# Altium PCB pcb.PcbDoc (part 1 of 2)
Units mil, origin at the board's own origin, x right, y up, seen from the top; angles counter-clockwise.
Board outline 6000 x 4000 mil, 4 copper layers (Top Layer, Ground, Power, Bottom Layer), stack 64.6 mil thick; 209 components, 184 nets, 1089 pads, 303 vias.
Unrouted connection lines stored in the file: 45.
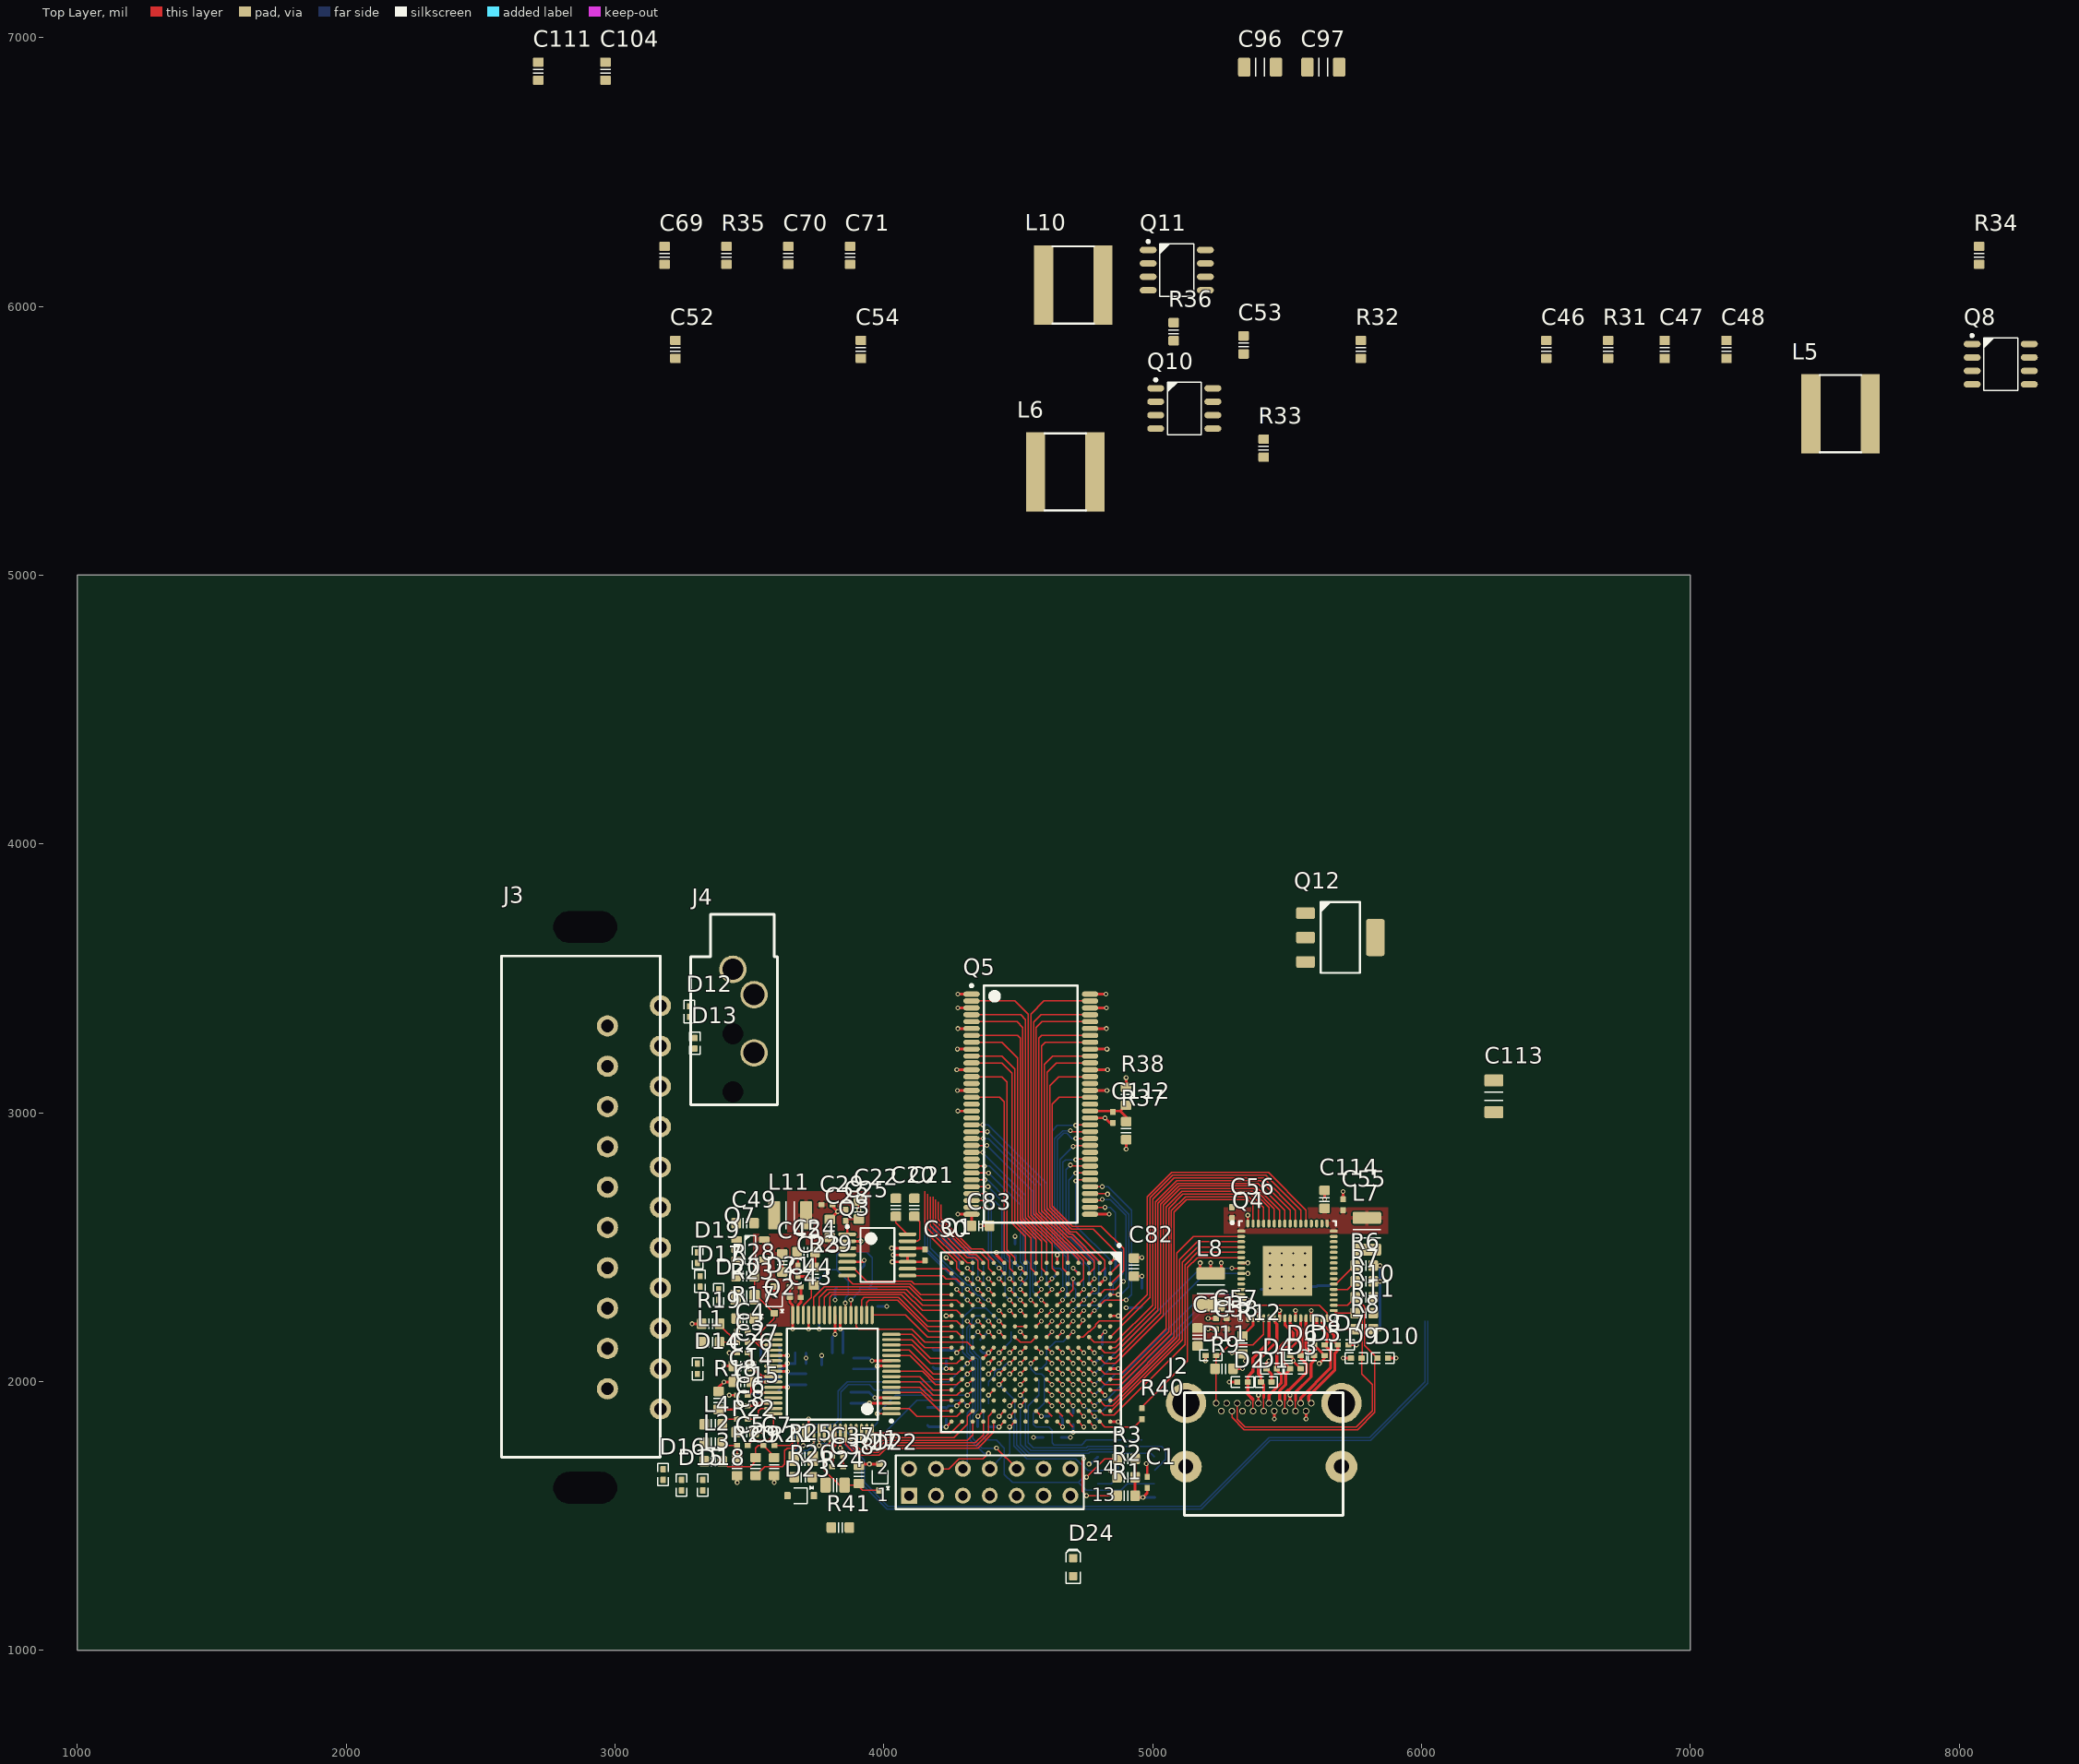
[diagram p0: Top Layer view]
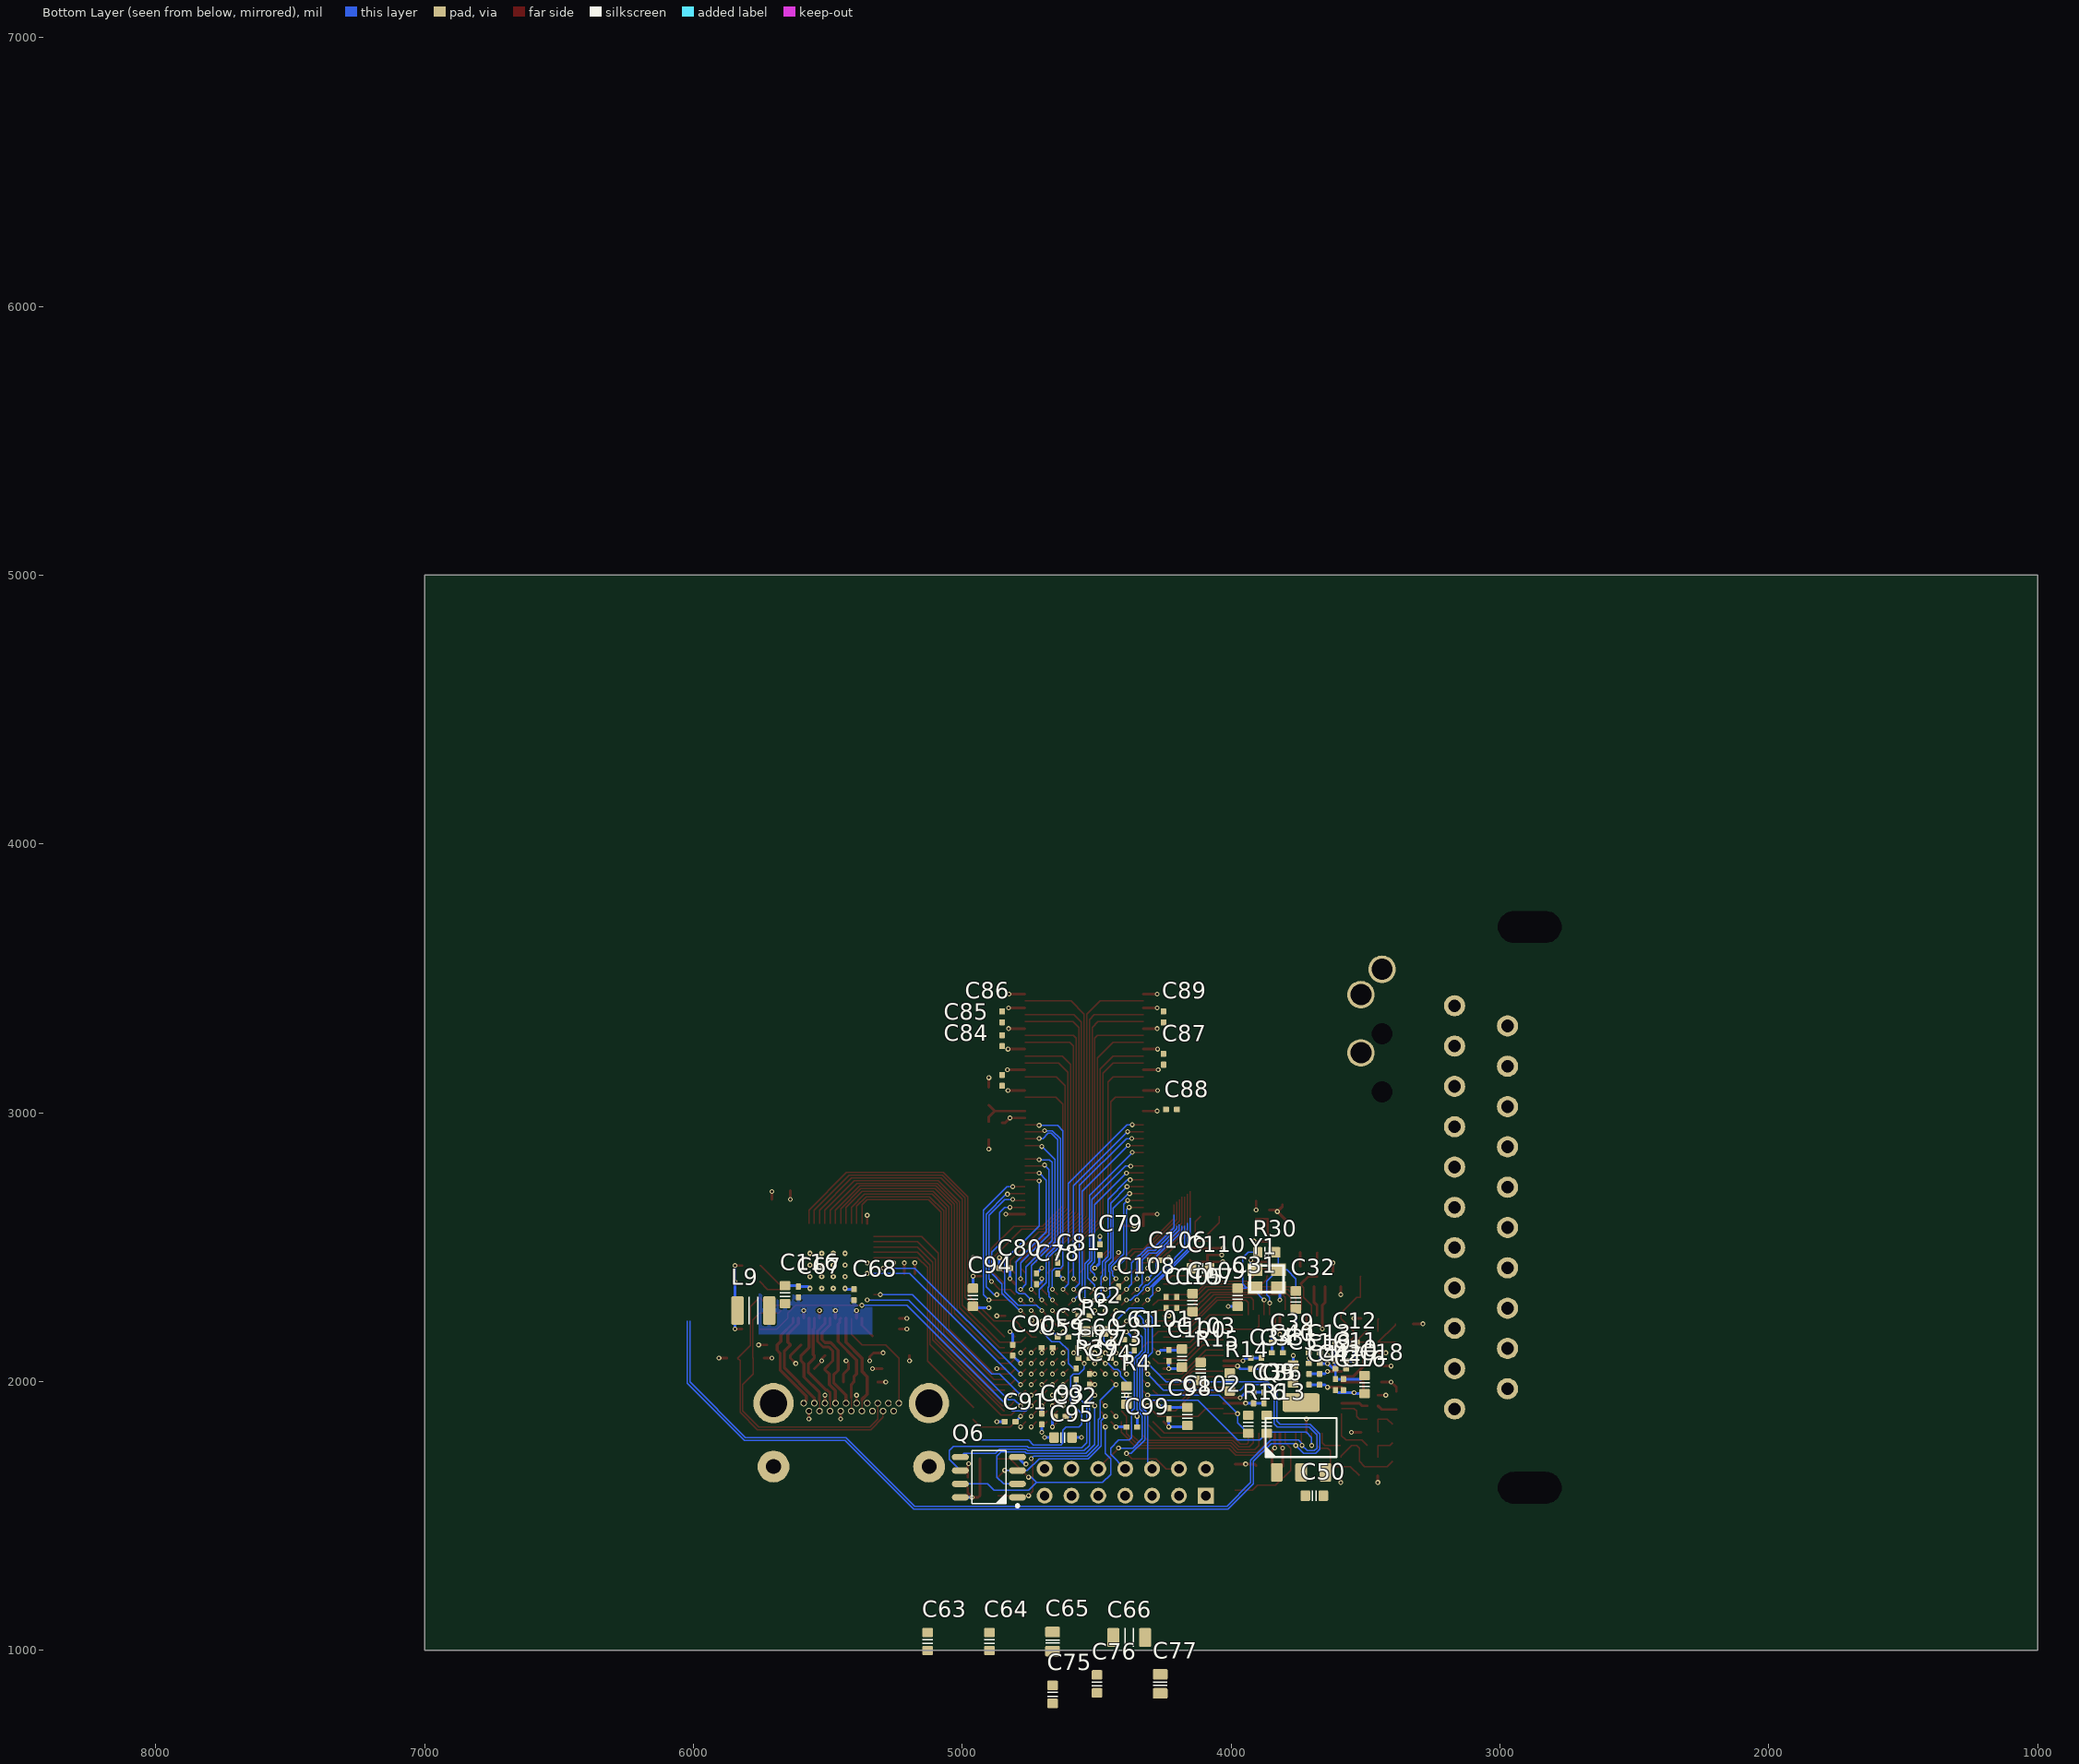
[diagram p1: Bottom Layer view, seen from below]

## Layer stack, top to bottom
Top Layer: signal copper 1.4
Dielectric: prepreg 6.7, FR-4, Dk 3.66
Ground: signal copper 0.7
Dielectric: core 47, FR-4, Dk 3.66
Power: signal copper 0.7
Dielectric: prepreg 6.7, FR-4, Dk 3.66
Bottom Layer: signal copper 1.4

## Board outline
1000,1000 7000,1000 7000,5000 1000,5000

## Design rules (kind name [scope] priority, off if disabled: settings)
Clearance [All] p1: gap=5
DiffPairsRouting [All] p1: maxlimit=5 minlimit=5 mostfreqgap=5 maxuncoupledlength=500
HoleSize [All] p1: absolutevalues=TRUE maxlimit=100 minlimit=10 maxpercent=80.000 minpercent=20.000
PolygonConnect [All] p1: connectstyle=Relief reliefconductorwidth=15 reliefentries=4 polygonreliefangle="90 Angle" airgapwidth=5
RoutingVias [All] p1: holewidth=10 width=18 viastyle="Through Hole" minholewidth=10 minwidth=18 maxholewidth=10 maxwidth=18
SolderMaskExpansion ViaMask [IsVia] p1: expansion=-9999
SolderMaskExpansion [All] p2: expansion=4
Width [All] p1: maxlimit=20 minlimit=5 preferedwidth=5
26 further rules are at their usual default settings.

## Classes and differential pairs
component class power: C33 C34 C35 C36 C37 C38 C39 C40 C41 C42 C43 C44 C45 C46 C47 C48 C49 C50 C51 C52 C53 C54 C55 C56 C57 C58 C59 C60 C61 C62 C63 C64 C65 C66 C67 C68 C69 C70 C71 C72 C73 C74 C75 C76 C77 C78 C79 C80 C81 C82 C83 C84 C85 C86 C87 C88 C89 C90 C91 C92 C93 C94 C95 C96 C97 C98 C99 C100 C101 C102 C103 C104 C105 C106 C107 C108 C109 C110 C111 C113 C114 C115 C116 L5 L6 L7 L8 L9 L10 Q1 Q7 Q8 Q9 Q10 Q11 Q12 R31 R32 R33 R34 R35 R36
component class mem: C112 Q5 R37 R38
component class input: C3 C4 C5 C6 C7 C8 C9 C10 C11 C12 C13 C14 C15 C16 C17 C18 C19 C20 C21 C22 C23 C24 C25 C26 C27 C28 C29 C30 C31 C32 D12 D13 D14 D15 D16 D17 D18 D19 D20 D21 D22 D23 J3 J4 L1 L2 L3 L4 L11 Q2 Q3 R13 R14 R15 R16 R17 R18 R19 R20 R21 R22 R23 R24 R25 R26 R27 R28 R29 R30 Y1
component class hdmi: D1 D2 D3 D4 D5 D6 D7 D8 D9 D10 D11 J2 Q4 R6 R7 R8 R9 R10 R11 R12 R40
component class fpga: C1 C2 D24 J1 Q6 R1 R2 R3 R4 R5 R39 R41
differential pair HDC: +HDC_P -HDC_N
differential pair HD2: +HD2_P -HD2_N
differential pair HD1: +HD1_P -HD1_N
differential pair HD0: +HD0_P -HD0_N
differential pair CK: +CK_P -CK_N

## Components (designator, comment, footprint, x,y, rotation, side; value= is the part's Value field where it differs from the comment)
C1 "Cap" CAPC1005X06L 4980.31,1624.02 r270 top
C2 "Cap" CAPC1005X06L 4625.98,2165.35 r180 bottom
C3 "Cap" CAPC1005X06L 3474.41,2145.67 r0 top
C4 "Cap" CAPC1005X06L 3474.41,2185.04 r0 top
C5 "Cap" CAPC1005X06L 3474.41,1761.81 r0 top
C6 "Cap" CAPC1005X06L 3474.41,1909.45 r0 top
C7 "Cap" CAPC1005X06L 3572.83,1761.81 r0 top
C8 "Cap" CAPC1005X06L 3474.41,1860.24 r0 top
C9 "Cap" CAPC1608X90N 3523.62,1683.07 r270 top
C10 "Cap" CAPC1005X06L 3592.52,2047.24 r180 bottom
C11 "Cap" CAPC1005X06L 3592.52,2076.77 r180 bottom
C12 "Cap" CAPC1608X90N 3572.83,2135.83 r180 bottom
C13 "Cap" CAPC1005X06L 3690.94,2106.3 r0 bottom
C14 "Cap" CAPC1608X90N 3474.41,1998.03 r0 top
C15 "Cap" CAPC1005X06L 3474.41,1948.82 r0 top
C16 "Cap" CAPC1005X06L 3582.68,1988.19 r90 bottom
C17 "Cap" CAPC1005X06L 3612.2,1988.19 r90 bottom
C18 "Cap" CAPC1608X90N 3503.94,1988.19 r90 bottom
C19 "Cap" CAPC1005X06L 3690.94,2066.93 r180 bottom
C20 "Cap" CAPC1608X90N 4045.28,2647.64 r270 top
C21 "Cap" CAPC1608X90N 4114.17,2647.64 r270 top
C22 "Cap" CAPC1608X90N 3907.48,2637.8 r90 top
C23 "Cap" CAPC1005X06L 3681.1,2411.42 r270 top
C24 "Cap" CAPC1608X90N 3710.63,2480.32 r0 top
C25 "Cap" CAPC1005X06L 3858.27,2618.11 r90 top
C26 "Cap" CAPC1608X90N 3474.41,2057.09 r0 top
C27 "Cap" CAPC1005X06L 3474.41,2106.3 r0 top
C28 "Cap" CAPC1608X90N 3799.21,2568.9 r90 top
C29 "Cap" CAPC1005X06L 3789.37,2657.48 r0 top
C30 "Cap" CAPC1005X06L 4153.54,2470.47 r90 top
C31 "Cap" CAPC1608X90N 3976.38,2312.99 r90 bottom
C32 "Cap" CAPC1608X90N 3759.84,2303.15 r90 bottom
C33 "Cap" CAPC1005X06L 3887.8,2066.93 r90 bottom
C34 "Cap" CAPC1005X06L 3927.17,2066.93 r90 bottom
C35 "Cap" CAPC1005X06L 3917.32,1938.98 r90 bottom
C36 "Cap" CAPC1005X06L 3877.95,1938.98 r90 bottom
C37 "Cap" CAPC1005X06L 3828.74,1722.44 r0 top
C38 "Cap" CAPC1005X06L 3828.74,1683.07 r0 top
C39 "Cap" CAPC1005X06L 3828.74,2145.67 r0 bottom
C40 "Cap" CAPC1005X06L 3828.74,2106.3 r0 bottom
C41 "Cap" CAPC1005X06L 3710.63,2007.87 r90 bottom
C42 "Cap" CAPC1005X06L 3671.26,2007.87 r90 bottom
C43 "Cap" CAPC1005X06L 3671.26,2312.99 r0 top
C44 "Cap" CAPC1005X06L 3671.26,2352.36 r0 top
C45 "Cap" CAPC1608X90N 3622.05,2440.94 r270 top
C46 "Cap" CAPC1608X90N 6465,5839.72 r90 top
C47 "Cap" CAPC1608X90N 6905,5839.72 r90 top
C48 "Cap" CAPC1608X90N 7135,5839.72 r90 top
C49 "Cap" CAPC1608X90N 3484.25,2588.58 r0 top
C50 "Cap" CAPC1608X90N 3690.94,1574.8 r0 bottom
C51 "Cap" CAPC1608X90N 3769.68,2027.56 r90 bottom
C52 "Cap" CAPC1608X90N 3225,5839.72 r90 top
C53 "Cap" CAPC1608X90N 5338.58,5856.3 r90 top
C54 "Cap" CAPC1608X90N 3915,5839.72 r90 top
C55 "Cap" CAPC1005X06L 5708.66,2657.48 r90 top
C56 "Cap" CAPC1005X06L 5295.28,2627.95 r90 top
C57 "Cap" CAPC1005X06L 5255.91,2234.25 r180 top
C58 "Cap" CAPC1005X06L 5255.91,2194.88 r180 top
C59 "Cap" CAPC1005X06L 4685.04,2125.98 r180 bottom
C60 "Cap" CAPC1005X06L 4547.24,2125.98 r0 bottom
C61 "Cap" CAPC1005X06L 4419.29,2155.51 r0 bottom
C62 "Cap" CAPC1005X06L 4547.24,2244.09 r180 bottom
C63 "Cap" CAPC1608X90N 5129.65,1032.24 r90 bottom
C64 "Cap" CAPC1608X90N 4899.65,1032.24 r90 bottom
C65 "Cap" CAPC2012X135N 4664.65,1032.24 r90 bottom
C66 "Cap" CAPC3216X100N 4379.65,1047.24 r180 bottom
C67 "Cap" CAPC1005X06L 5610.24,2332.68 r270 bottom
C68 "Cap" CAPC1005X06L 5403.54,2322.83 r270 bottom
C69 "Cap" CAPC1608X90N 3185,6189.72 r90 top
C70 "Cap" CAPC1608X90N 3645,6189.72 r90 top
C71 "Cap" CAPC1608X90N 3875,6189.72 r90 top
C72 "Cap" CAPC1005X06L 4547.24,2086.61 r180 bottom
C73 "Cap" CAPC1005X06L 4468.5,2086.61 r180 bottom
C74 "Cap" CAPC1005X06L 4527.56,2007.87 r90 bottom
C75 "Cap" CAPC1608X90N 4664.53,835.75 r90 bottom
C76 "Cap" CAPC1608X90N 4499.41,874.76 r90 bottom
C77 "Cap" CAPC2012X135N 4264.41,874.76 r90 bottom
C78 "Cap" CAPC1005X06L 4724.41,2381.89 r270 bottom
C79 "Cap" CAPC1005X06L 4488.19,2490.16 r270 bottom
C80 "Cap" CAPC1005X06L 4842.52,2421.26 r180 bottom
C81 "Cap" CAPC1005X06L 4645.67,2421.26 r90 bottom
C82 "Cap" CAPC1608X90N 4931.1,2425.2 r270 top
C83 "Cap" CAPC1608X90N 4360.24,2578.74 r0 top
C84 "Cap" CAPC1005X06L 4852.36,3120.08 r90 bottom
C85 "Cap" CAPC1005X06L 4852.36,3267.72 r90 bottom
C86 "Cap" CAPC1005X06L 4852.36,3356.3 r270 bottom
C87 "Cap" CAPC1005X06L 4251.97,3198.82 r90 bottom
C88 "Cap" CAPC1005X06L 4222.44,3011.81 r0 bottom
C89 "Cap" CAPC1005X06L 4251.97,3356.3 r90 bottom
C90 "Cap" CAPC1005X06L 4812.99,2116.14 r270 bottom
C91 "Cap" CAPC1005X06L 4822.83,1850.39 r0 bottom
C92 "Cap" CAPC1005X06L 4635.83,1870.08 r180 bottom
C93 "Cap" CAPC1005X06L 4704.72,1860.24 r90 bottom
C94 "Cap" CAPC1608X90N 4960.63,2312.99 r90 bottom
C95 "Cap" CAPC1608X90N 4625.98,1791.34 r0 bottom
C96 "Cap" CAPC3216X100N 5400,6889.72 r0 top
C97 "Cap" CAPC3216X100N 5635,6889.72 r0 top
C98 "Cap" CAPC1005X06L 4232.28,1879.92 r90 bottom
C99 "Cap" CAPC1005X06L 4370.08,1830.71 r0 bottom
C100 "Cap" CAPC1005X06L 4232.28,2096.46 r270 bottom
C101 "Cap" CAPC1005X06L 4360.24,2135.83 r270 bottom
C102 "Cap" CAPC1608X90N 4163.39,1870.08 r270 bottom
C103 "Cap" CAPC1608X90N 4183.07,2086.61 r90 bottom
C104 "Cap" CAPC1608X90N 2965,6874.72 r90 top
C105 "Cap" CAPC1005X06L 4242.13,2293.31 r90 bottom
C106 "Cap" CAPC1005X06L 4281.5,2450.79 r180 bottom
C107 "Cap" CAPC1005X06L 4202.76,2293.31 r90 bottom
C108 "Cap" CAPC1005X06L 4419.29,2332.68 r90 bottom
C109 "Cap" CAPC1608X90N 4143.7,2293.31 r270 bottom
C110 "Cap" CAPC1608X90N 4114.17,2421.26 r0 bottom
C111 "Cap" CAPC1608X90N 2715,6874.72 r90 top
C112 "Cap" CAPC1005X06L 4852.36,2982.28 r270 top
C113 "Cap" CAPC3216X100N 6269.69,3061.02 r90 top
C114 "Cap" CAPC1608X90N 5639.76,2677.17 r270 top
C115 "Cap" CAPC1608X90N 5167.32,2165.35 r90 top
C116 "Cap" CAPC1608X90N 5659.45,2322.83 r90 bottom
D1 "EZAEG2A" CAPC1005X55N 5423.23,1998.03 r180 top
D2 "EZAEG2A" CAPC1005X55N 5334.65,1998.03 r0 top
D3 "EZAEG2A" CAPC1005X55N 5531.5,2047.24 r180 top
D4 "EZAEG2A" CAPC1005X55N 5442.91,2047.24 r0 top
D5 "EZAEG2A" CAPC1005X55N 5620.08,2096.46 r180 top
D6 "EZAEG2A" CAPC1005X55N 5531.5,2096.46 r0 top
D7 "EZAEG2A" CAPC1005X55N 5708.66,2135.83 r180 top
D8 "EZAEG2A" CAPC1005X55N 5620.08,2135.83 r0 top
D9 "EZAEG2A" CAPC1005X55N 5757.87,2086.61 r0 top
D10 "EZAEG2A" CAPC1005X55N 5856.3,2086.61 r180 top
D11 "EZAEG2A" CAPC1005X55N 5216.54,2096.46 r0 top
D12 "EZAEG2A" CAPC1005X55N 3277.56,3375.98 r90 top
D13 "EZAEG2A" CAPC1005X55N 3297.24,3257.87 r270 top
D14 "EZAEG2A" CAPC1005X55N 3307.09,2047.24 r90 top
D15 "EZAEG2A" CAPC1005X55N 3248.03,1614.17 r90 top
D16 "EZAEG2A" CAPC1005X55N 3179.13,1653.54 r90 top
D17 "EZAEG2A" CAPC1005X55N 3316.93,2372.05 r90 top
D18 "EZAEG2A" CAPC1005X55N 3326.77,1614.17 r90 top
D19 "EZAEG2A" CAPC1005X55N 3307.09,2460.63 r90 top
D20 "EZAEG2A" CAPC1005X55N 3385.83,2322.83 r90 top
D21 "3V3" SOD323 3592.52,2303.15 r90 top
D22 "3V3" SOD323 3986.22,1643.7 r90 top
D23 "3V3" SOD323 3690.94,1574.8 r180 top
D24 "LED2" LED-0603 4704.71,1309.05 r90 top
J1 "Header 7X2" HDR2X7 4094.49,1574.8 r0 top
J2 "HDMI" 2000-1-1-20-00-BK 5413.39,1919.29 r90 top
J3 "SCART" SCART 3169.29,2647.64 r90 top
J4 "AUDIO" SJ1-3533NG 3474.41,3533.46 r270 top
L1 "" CAPC1608X90N 3356.3,2145.67 r0 top
L2 "" CAPC1608X90N 3366.14,1771.65 r0 top
L3 "" CAPC1608X90N 3366.14,1702.76 r0 top
L4 "" CAPC1608X90N 3366.14,1840.55 r0 top
L5 "NRS8030T2R2NJGJ" NRS8030T2R2NJGJ 7559.06,5600.39 r180 top
L6 "NRS8030T2R2NJGJ" NRS8030T2R2NJGJ 4675.2,5383.86 r0 top
L7 "LBC3225T100KR" CAPC3225X220N 5797.24,2549.21 r270 top
L8 "LBC3225T100KR" CAPC3225X220N 5216.54,2342.52 r90 top
L9 "LBC3225T100KR" CAPC3225X220N 5777.56,2263.78 r0 bottom
L10 "NRS8030T2R2NJGJ" NRS8030T2R2NJGJ 4705,6079.72 r0 top
L11 "LBC3225T100KR" CAPC3225X220N 3651.57,2618.11 r0 top
Q1 "XC7A35T" BGA256C100P16X16_1700X1700X155 4547.24,2145.67 r270 top locked
Q2 "ADV7181C" TSQFP50P1200X1200X145-64N 3809.06,2027.56 r180 top locked
Q3 "PCM1808" TSOP65P640X120-14N 3976.38,2470.47 r0 top
Q4 "AD9889B" QFN50P900X875X100_HS-65N 5501.97,2411.42 r0 top
Q5 "AS4C8M16D1" TSOP65P1180X120-66N 4547.24,3031.5 r0 top locked
Q6 "S25FL032P" SOIC127P600X175-8AN 4901.57,1643.7 r0 bottom
Q7 "LDO235" SOT23-5 3503.94,2490.16 r0 top
Q8 "PAM2310" SOIC127P600X175-8AN 8155,5784.72 r0 top
Q9 "AP1117-3.3V" SOT223 3740.16,1791.34 r90 bottom
Q10 "PAM2310" SOIC127P600X175-8AN 5118.11,5620.08 r0 top
Q11 "PAM2310" SOIC127P600X175-8AN 5090,6134.72 r0 top
Q12 "AP1117-2.5V" SOT223 5698.82,3651.57 r0 top
R1 "Res3" CAPC1608X90N 4901.57,1574.8 r0 top
R2 "Res3" CAPC1608X90N 4901.57,1643.7 r0 top
R3 "Res3" CAPC1608X90N 4901.57,1712.6 r0 top
R4 "Res3" CAPC1608X90N 4389.76,1948.82 r270 bottom
R5 "Res3" CAPC1608X90N 4507.87,2185.04 r0 bottom
R6 "Res3" CAPC1608X90N 5787.4,2431.1 r0 top
R7 "Res3" CAPC1608X90N 5787.4,2372.05 r0 top
R8 "Res3" CAPC1608X90N 5787.4,2194.88 r0 top
R9 "Res3" CAPC1608X90N 5265.75,2047.24 r180 top
R10 "Res3" CAPC1608X90N 5787.4,2312.99 r180 top
R11 "Res3" CAPC1608X90N 5787.4,2253.94 r180 top
R12 "Res3" CAPC1608X90N 5334.65,2135.83 r90 top
R13 "Res3" CAPC1608X90N 3868.11,1840.55 r90 bottom
R14 "Res3" CAPC1608X90N 4005.91,1998.19 r90 bottom
R15 "Res3" CAPC1608X90N 4114.17,2037.4 r90 bottom
R16 "Res3" CAPC1608X90N 3937.01,1840.55 r90 bottom
R17 "Res3" CAPC1608X90N 3484.25,2234.25 r0 top
R18 "Res3" CAPC1608X90N 3385.83,1929.13 r90 top
R19 "Res3" CAPC1608X90N 3356.3,2214.57 r0 top
R20 "Res3" CAPC1608X90N 3454.72,1683.07 r90 top
R21 "Res3" CAPC1608X90N 3592.52,1683.07 r90 top
R22 "Res3" CAPC1608X90N 3484.25,1811.02 r180 top
R23 "Res3" CAPC2012X135N 3484.25,2312.99 r180 top
R24 "Res3" CAPC2012X135N 3818.9,1614.17 r180 top
R25 "Res3" CAPC2012X135N 3700.79,1712.6 r180 top
R26 "Res3" CAPC1608X90N 3700.79,1643.7 r0 top
R27 "Res3" CAPC1608X90N 3907.48,1653.54 r270 top
R28 "Res3" CAPC1608X90N 3484.25,2391.73 r0 top
R29 "Res3" CAPC1608X90N 3740.16,2391.73 r270 top
R30 "Res3" CAPC1608X90N 3868.11,2480.32 r0 bottom
R31 "Res3" CAPC1608X90N 6695,5839.72 r90 top
R32 "Res3" CAPC1608X90N 5775,5839.72 r90 top
R33 "Res3" CAPC1608X90N 5413.39,5472.44 r90 top
R34 "Res3" CAPC1608X90N 8075,6189.72 r90 top
R35 "Res3" CAPC1608X90N 3415,6189.72 r90 top
R36 "Res3" CAPC1608X90N 5078.74,5905.51 r90 top
R37 "Res3" CAPC1608X90N 4901.57,2933.07 r90 top
R38 "Res3" CAPC1608X90N 4901.57,3061.02 r90 top
R39 "Res3" CAPC1005X06L 4576.77,2027.56 r90 bottom
R40 "Res3" CAPC1005X06L 4960.63,1879.92 r270 top
R41 "Res3" CAPC1608X90N 3838.58,1456.69 r0 top
Y1 "28.63636 MHz" ABM8G 3868.11,2381.89 r180 bottom

## Footprints (in the part's own frame and the unit in brackets; to place one, negate y for a bottom-side part, rotate by r counter-clockwise, add the part's x,y. Pads: shape width x height; smd on the part's side, far side on the other; paste and mask are expansions set on the pad)
2000-1-1-20-00-BK [mm]
  round 3 hole 1.4: 0(-6,7.35) 0(-6,-7.35)
  round 3.8 hole 2.6: 0(0,7.334) 0(0,-7.35)
  round 0.619 hole 0.45: 1(0,-4.5) 2(-0.75,-4) 3(0,-3.5) 4(-0.75,-3) 5(0,-2.5) 6(-0.75,-2) 7(0,-1.5) 8(-0.75,-1) 9(0,-0.5) 10(-0.75,0) 11(0,0.5) 12(-0.75,1) 13(0,1.5) 14(-0.75,2) 15(0,2.5) 16(-0.75,3) 17(0,3.5) 18(-0.75,4) 19(0,4.5)
  silkscreen extent -10.6,-7.5 1,7.5
ABM8G [mm]
  rect 1.4x1.2 smd: 1(-1.1,-0.85) 2(1.1,-0.85) 3(1.1,0.85) 4(-1.1,0.85)
  silkscreen extent -1.6,-1.25 1.6,1.25
BGA256C100P16X16_1700X1700X155 [mm] "BGA, 256-Leads, Body 17.00x17.00mmx1.55mm, Pitch 1.00mm"
  round 0.4 smd: A1(-7.5,7.5) A2(-6.5,7.5) A3(-5.5,7.5) A4(-4.5,7.5) A5(-3.5,7.5) A6(-2.5,7.5) A7(-1.5,7.5) A8(-0.5,7.5) A9(0.5,7.5) A10(1.5,7.5) A11(2.5,7.5) A12(3.5,7.5) A13(4.5,7.5) A14(5.5,7.5) A15(6.5,7.5) A16(7.5,7.5) B1(-7.5,6.5) B2(-6.5,6.5) B3(-5.5,6.5) B4(-4.5,6.5) B5(-3.5,6.5) B6(-2.5,6.5) B7(-1.5,6.5) B8(-0.5,6.5) B9(0.5,6.5) B10(1.5,6.5) B11(2.5,6.5) B12(3.5,6.5) B13(4.5,6.5) B14(5.5,6.5) B15(6.5,6.5) B16(7.5,6.5) C1(-7.5,5.5) C2(-6.5,5.5) C3(-5.5,5.5) C4(-4.5,5.5) C5(-3.5,5.5) C6(-2.5,5.5) C7(-1.5,5.5) C8(-0.5,5.5) C9(0.5,5.5) C10(1.5,5.5) C11(2.5,5.5) C12(3.5,5.5) C13(4.5,5.5) C14(5.5,5.5) C15(6.5,5.5) C16(7.5,5.5) D1(-7.5,4.5) D2(-6.5,4.5) D3(-5.5,4.5) D4(-4.5,4.5) D5(-3.5,4.5) D6(-2.5,4.5) D7(-1.5,4.5) D8(-0.5,4.5) D9(0.5,4.5) D10(1.5,4.5) D11(2.5,4.5) D12(3.5,4.5) D13(4.5,4.5) D14(5.5,4.5) D15(6.5,4.5) D16(7.5,4.5) E1(-7.5,3.5) E2(-6.5,3.5) E3(-5.5,3.5) E4(-4.5,3.5) E5(-3.5,3.5) E6(-2.5,3.5) E7(-1.5,3.5) E8(-0.5,3.5) E9(0.5,3.5) E10(1.5,3.5) E11(2.5,3.5) E12(3.5,3.5) E13(4.5,3.5) E14(5.5,3.5) E15(6.5,3.5) E16(7.5,3.5) F1(-7.5,2.5) F2(-6.5,2.5) F3(-5.5,2.5) F4(-4.5,2.5) F5(-3.5,2.5) F6(-2.5,2.5) F7(-1.5,2.5) F8(-0.5,2.5) F9(0.5,2.5) F10(1.5,2.5) F11(2.5,2.5) F12(3.5,2.5) F13(4.5,2.5) F14(5.5,2.5) F15(6.5,2.5) F16(7.5,2.5) G1(-7.5,1.5) G2(-6.5,1.5) G3(-5.5,1.5) G4(-4.5,1.5) G5(-3.5,1.5) G6(-2.5,1.5) G7(-1.5,1.5) G8(-0.5,1.5) G9(0.5,1.5) G10(1.5,1.5) G11(2.5,1.5) G12(3.5,1.5) G13(4.5,1.5) G14(5.5,1.5) G15(6.5,1.5) G16(7.5,1.5) H1(-7.5,0.5) H2(-6.5,0.5) H3(-5.5,0.5) H4(-4.5,0.5) H5(-3.5,0.5) H6(-2.5,0.5) H7(-1.5,0.5) H8(-0.5,0.5) H9(0.5,0.5) H10(1.5,0.5) H11(2.5,0.5) H12(3.5,0.5) H13(4.5,0.5) H14(5.5,0.5) H15(6.5,0.5) H16(7.5,0.5) J1(-7.5,-0.5) J2(-6.5,-0.5) J3(-5.5,-0.5) J4(-4.5,-0.5) J5(-3.5,-0.5) J6(-2.5,-0.5) J7(-1.5,-0.5) J8(-0.5,-0.5) J9(0.5,-0.5) J10(1.5,-0.5) J11(2.5,-0.5) J12(3.5,-0.5) J13(4.5,-0.5) J14(5.5,-0.5) J15(6.5,-0.5) J16(7.5,-0.5) K1(-7.5,-1.5) K2(-6.5,-1.5) K3(-5.5,-1.5) K4(-4.5,-1.5) K5(-3.5,-1.5) K6(-2.5,-1.5) K7(-1.5,-1.5) K8(-0.5,-1.5) K9(0.5,-1.5) K10(1.5,-1.5) K11(2.5,-1.5) K12(3.5,-1.5) K13(4.5,-1.5) K14(5.5,-1.5) K15(6.5,-1.5) K16(7.5,-1.5) L1(-7.5,-2.5) L2(-6.5,-2.5) L3(-5.5,-2.5) L4(-4.5,-2.5) L5(-3.5,-2.5) L6(-2.5,-2.5) L7(-1.5,-2.5) L8(-0.5,-2.5) L9(0.5,-2.5) L10(1.5,-2.5) L11(2.5,-2.5) L12(3.5,-2.5) L13(4.5,-2.5) L14(5.5,-2.5) L15(6.5,-2.5) L16(7.5,-2.5) M1(-7.5,-3.5) M2(-6.5,-3.5) M3(-5.5,-3.5) M4(-4.5,-3.5) M5(-3.5,-3.5) M6(-2.5,-3.5) M7(-1.5,-3.5) M8(-0.5,-3.5) M9(0.5,-3.5) M10(1.5,-3.5) M11(2.5,-3.5) M12(3.5,-3.5) M13(4.5,-3.5) M14(5.5,-3.5) M15(6.5,-3.5) M16(7.5,-3.5) N1(-7.5,-4.5) N2(-6.5,-4.5) N3(-5.5,-4.5) N4(-4.5,-4.5) N5(-3.5,-4.5) N6(-2.5,-4.5) N7(-1.5,-4.5) N8(-0.5,-4.5) N9(0.5,-4.5) N10(1.5,-4.5) N11(2.5,-4.5) N12(3.5,-4.5) N13(4.5,-4.5) N14(5.5,-4.5) N15(6.5,-4.5) N16(7.5,-4.5) P1(-7.5,-5.5) P2(-6.5,-5.5) P3(-5.5,-5.5) P4(-4.5,-5.5) P5(-3.5,-5.5) P6(-2.5,-5.5) P7(-1.5,-5.5) P8(-0.5,-5.5) P9(0.5,-5.5) P10(1.5,-5.5) P11(2.5,-5.5) P12(3.5,-5.5) P13(4.5,-5.5) P14(5.5,-5.5) P15(6.5,-5.5) P16(7.5,-5.5) R1(-7.5,-6.5) R2(-6.5,-6.5) R3(-5.5,-6.5) R4(-4.5,-6.5) R5(-3.5,-6.5) R6(-2.5,-6.5) R7(-1.5,-6.5) R8(-0.5,-6.5) R9(0.5,-6.5) R10(1.5,-6.5) R11(2.5,-6.5) R12(3.5,-6.5) R13(4.5,-6.5) R14(5.5,-6.5) R15(6.5,-6.5) R16(7.5,-6.5) T1(-7.5,-7.5) T2(-6.5,-7.5) T3(-5.5,-7.5) T4(-4.5,-7.5) T5(-3.5,-7.5) T6(-2.5,-7.5) T7(-1.5,-7.5) T8(-0.5,-7.5) T9(0.5,-7.5) T10(1.5,-7.5) T11(2.5,-7.5) T12(3.5,-7.5) T13(4.5,-7.5) T14(5.5,-7.5) T15(6.5,-7.5) T16(7.5,-7.5)
  silkscreen extent -9.27,-8.5 8.5,8.5, body extent -8.5,-8.5 8.5,8.5, height 1.55
CAPC1005X06L [mm] "Chip Capacitor, 2-Leads, Body 1,0x0,5mm, IPC High Density"
  rrect20% 0.57x0.5 smd: 1(-0.515,0) 2(0.515,0)
  body extent -0.55,-0.3 0.55,0.3, height 0.6
CAPC1005X55N [mm] "Chip Capacitor, Body 1.0x0.5mm, EIA 0402, IPC Medium Density"
  round 0.2 on Mech15: 0(0,0)
  rrect20% 0.6x0.5 smd: 1(-0.5,0) 2(0.5,0)
  Top Layer pour cut-out: -0.325,0.375 -0.2,0.5 0.2,0.5 0.325,0.375 0.325,-0.375 0.2,-0.5 -0.2,-0.5 -0.325,-0.375
  silkscreen extent -1.05,-0.5 1.05,0.5, body extent -0.52,-0.27 0.53,0.28, height 0.55
CAPC1608X90N [mm] "Chip Capacitor, Body 1.6x0.8mm, EIA 0603, IPC Medium Density"
  round 0.254 on Mech15: 0(0,0)
  rrect25% 0.9x1 smd: 1(-0.85,0) 2(0.85,0)
  Top Layer pour cut-out: -0.6,0.5 -0.4,0.7 0.4,0.7 0.6,0.5 0.6,-0.5 0.4,-0.7 -0.4,-0.7 -0.6,-0.5
  silkscreen extent -0.18,-0.48 0.18,0.48, body extent -0.85,-0.45 0.85,0.45, height 0.89
CAPC2012X135N [mm] "Chip Capacitor, Body 2.0x1.2mm, EIA 0805, IPC Medium Density"
  round 0.254 on Mech15: 0(0,0)
  rrect25% 1x1.4 smd: 1(-0.9,0) 2(0.9,0)
  Top Layer pour cut-out: -0.675,0.7 -0.475,0.9 0.475,0.9 0.675,0.7 0.675,-0.7 0.475,-0.9 -0.475,-0.9 -0.675,-0.7
  silkscreen extent -0.15,-0.65 0.15,0.65, body extent -1.1,-0.72 1.1,0.73, height 1.34
CAPC3216X100N [mm] "Chip Capacitor, Body 3.2x1.6mm, 1.0mm H, EIA 1206, IPC Medium Density"
  round 0.508 on Mech15: 0(0,0)
  rrect25% 1.15x1.8 smd: 1(-1.5,0) 2(1.5,0)
  silkscreen extent -0.4,-0.88 0.4,0.88, body extent -1.7,-0.9 1.7,0.9, height 1
CAPC3225X220N [mm] "Chip Capacitor, Body 3.2x2.5mm, EIA 1210, IPC Medium Density"
  round 0.508 on Mech15: 0(0,0)
  rrect25% 1.15x2.7 smd: 1(-1.5,0) 2(1.5,0)
  silkscreen extent -0.4,-1.3 0.4,1.3, body extent -1.8,-1.4 1.8,1.4, height 2.19
HDR2X7 [mm] "Connector; Header; 7x2 Position"
  rect 1.5x1.5 hole 0.9: 1(0,0)
  round 1.5 hole 0.9: 2(0,2.54) 3(2.54,0) 4(2.54,2.54) 5(5.08,0) 6(5.08,2.54) 7(7.62,0) 8(7.62,2.54) 9(10.16,0) 10(10.16,2.54) 11(12.7,0) 12(12.7,2.54) 13(15.24,0) 14(15.24,2.54)
  silkscreen extent -1.27,-1.27 16.51,3.81
LED-0603 [mm]
  round 0.254 on Mech15: 0(0,0)
  rrect25% 0.8x0.8 smd: A(-0.85,0) K(0.85,0)
  Top Layer pour cut-out: -0.5,0.5 0.5,0.5 0.5,-0.5 -0.5,-0.5
  silkscreen extent -1.55,-0.67 1.68,0.67, body extent -0.8,-0.4 0.8,0.4, height 0.75
NRS8030T2R2NJGJ [mm] "Chip Inductor, 2-Leads, Body 8.00x8.00mm, IPC Medium Density"
  rect 1.8x7.5 smd: 1(-2.8,0) 2(2.8,0)
  silkscreen extent -1.95,-3.65 1.95,3.65, body extent -4.1,-4.1 4.1,4.1, height 3
QFN50P900X875X100_HS-65N [mm] "QFN, 64-Leads, Body 9.00x8.75mm, Pitch 0.50mm, Thermal Pad 4.70x4.70mm, IPC Medium Density"
  oval 0.75x0.3 smd: 1(-4.375,3.75) 2(-4.375,3.25) 3(-4.375,2.75) 4(-4.375,2.25) 5(-4.375,1.75) 6(-4.375,1.25) 7(-4.375,0.75) 8(-4.375,0.25) 9(-4.375,-0.25) 10(-4.375,-0.75) 11(-4.375,-1.25) 12(-4.375,-1.75) 13(-4.375,-2.25) 14(-4.375,-2.75) 15(-4.375,-3.25) 16(-4.375,-3.75) 33(4.375,-3.75) 34(4.375,-3.25) 35(4.375,-2.75) 36(4.375,-2.25) 37(4.375,-1.75) 38(4.375,-1.25) 39(4.375,-0.75) 40(4.375,-0.25) 41(4.375,0.25) 42(4.375,0.75) 43(4.375,1.25) 44(4.375,1.75) 45(4.375,2.25) 46(4.375,2.75) 47(4.375,3.25) 48(4.375,3.75)
  oval 0.3x0.75 smd: 17(-3.75,-4.475) 18(-3.25,-4.475) 19(-2.75,-4.475) 20(-2.25,-4.475) 21(-1.75,-4.475) 22(-1.25,-4.475) 23(-0.75,-4.475) 24(-0.25,-4.475) 25(0.25,-4.475) 26(0.75,-4.475) 27(1.25,-4.475) 28(1.75,-4.475) 29(2.25,-4.475) 30(2.75,-4.475) 31(3.25,-4.475) 32(3.75,-4.475) 49(3.75,4.475) 50(3.25,4.475) 51(2.75,4.475) 52(2.25,4.475) 53(1.75,4.475) 54(1.25,4.475) 55(0.75,4.475) 56(0.25,4.475) 57(-0.25,4.475) 58(-0.75,4.475) 59(-1.25,4.475) 60(-1.75,4.475) 61(-2.25,4.475) 62(-2.75,4.475) 63(-3.25,4.475) 64(-3.75,4.475)
  rect 4.7x4.7 smd: 65(0,0)
  silkscreen extent -5.35,-4.7 4.57,4.7, body extent -4.43,-4.55 4.43,4.55, height 1
SCART [mm]
  round 2 hole 1.2: 1(-19.05,0) 2(-17.145,5) 3(-15.24,0) 4(-13.335,5) 5(-11.43,0) 6(-9.525,5) 7(-7.62,0) 8(-5.715,5) 9(-3.81,0) 10(-1.905,5) 11(0,0) 12(1.905,5) 13(3.81,0) 14(5.715,5) 15(7.62,0) 16(9.525,5) 17(11.43,0) 18(13.335,5) 19(15.24,0) 20(17.145,5) 21(19.05,0)
  round 1.524 hole 3 slot 6 at 90 deg unplated: ""(-26.5,7.1) ""(26.5,7.1)
  silkscreen extent -23.6,0 23.75,15
SJ1-3533NG [mm]
  round 2.6 hole 2: 1(0,-0.9) 2(2.4,1.1) 3(7.9,1.1)
  round 0 hole 2: 5(6.1,-0.9) 5(11.6,-0.9)
  silkscreen extent -5.2,-4.9 12.8,3.3
SOD323 [mm] "SOD-323; 2 Leads; Body 1.8 x 1.35 mm, (LxW)"
  round 0.508 on Mech15: 0(0,0)
  rrect25% 0.6x0.7 smd: A(1.25,0) K(-1.25,0)
  silkscreen extent -1.2,-0.9 0.64,0.75, body extent -1.3,-0.68 1.3,0.68, height 1.1
SOIC127P600X175-8AN [mm] "SOIC, 8-Leads, Body 4.9x3.9mm, Pitch 1.27mm, IPC Medium Density"
  round 1 on Mech15: 0(0,0)
  oval 1.6x0.6 smd: 1(-2.7,1.905) 2(-2.7,0.635) 3(-2.7,-0.635) 4(-2.7,-1.905) 5(2.7,-1.905) 6(2.7,-0.635) 7(2.7,0.635) 8(2.7,1.905)
  silkscreen extent -2.82,-2.5 1.6,2.82, body extent -3,-2.45 3,2.45, height 1.75
SOT23-5 [mm]
  round 0.5 on Mech15: 0(0,0)
  rrect25% 1x0.6 smd: 1(-1.3,0.95) 2(-1.3,0) 3(-1.3,-0.95) 4(1.3,-0.95) 5(1.3,0.95)
  silkscreen extent -0.51,-1.35 0.51,1.35, body extent -1.4,-1.45 1.4,1.45, height 1.44
SOT223 [mm] "SOT223 /SC-73"
  round 1 on Mech15: 0(0,0)
  rrect25% 1.75x1.1 smd: 1(-3.3,2.3) 2(-3.3,0) 3(-3.3,-2.3)
  rrect25% 1.75x3.5 smd: 4(3.3,0)
  silkscreen extent -1.85,-3.35 1.85,3.35, body extent -3.65,-3.35 3.65,3.35, height 1.8
TSOP65P640X120-14N [mm] "TSOP, 14-Leads, Body 5.00x4.40mm, Pitch 0.65mm, IPC Medium Density"
  oval 1.7x0.35 smd: 1(-2.85,1.95) 2(-2.85,1.3) 3(-2.85,0.65) 4(-2.85,0) 5(-2.85,-0.65) 6(-2.85,-1.3) 7(-2.85,-1.95) 8(2.85,-1.95) 9(2.85,-1.3) 10(2.85,-0.65) 11(2.85,0) 12(2.85,0.65) 13(2.85,1.3) 14(2.85,1.95)
  silkscreen extent -2.97,-2.55 1.6,2.8, body extent -2.25,-2.55 2.25,2.55, height 1.2
TSOP65P1180X120-66N [mm] "TSOP, 66-Leads, Body 22.22x10.06mm, Pitch 0.65mm, IPC Medium Density"
  oval 1.55x0.5 smd: 1(-5.6,10.4) 2(-5.6,9.75) 3(-5.6,9.1) 4(-5.6,8.45) 5(-5.6,7.8) 6(-5.6,7.15) 7(-5.6,6.5) 8(-5.6,5.85) 9(-5.6,5.2) 10(-5.6,4.55) 11(-5.6,3.9) 12(-5.6,3.25) 13(-5.6,2.6) 14(-5.6,1.95) 15(-5.6,1.3) 16(-5.6,0.65) 17(-5.6,0) 18(-5.6,-0.65) 19(-5.6,-1.3) 20(-5.6,-1.95) 21(-5.6,-2.6) 22(-5.6,-3.25) 23(-5.6,-3.9) 24(-5.6,-4.55) 25(-5.6,-5.2) 26(-5.6,-5.85) 27(-5.6,-6.5) 28(-5.6,-7.15) 29(-5.6,-7.8) 30(-5.6,-8.45) 31(-5.6,-9.1) 32(-5.6,-9.75) 33(-5.6,-10.4) 34(5.6,-10.4) 35(5.6,-9.75) 36(5.6,-9.1) 37(5.6,-8.45) 38(5.6,-7.8) 39(5.6,-7.15) 40(5.6,-6.5) 41(5.6,-5.85) 42(5.6,-5.2) 43(5.6,-4.55) 44(5.6,-3.9) 45(5.6,-3.25) 46(5.6,-2.6) 47(5.6,-1.95) 48(5.6,-1.3) 49(5.6,-0.65) 50(5.6,0) 51(5.6,0.65) 52(5.6,1.3) 53(5.6,1.95) 54(5.6,2.6) 55(5.6,3.25) 56(5.6,3.9) 57(5.6,4.55) 58(5.6,5.2) 59(5.6,5.85) 60(5.6,6.5) 61(5.6,7.15) 62(5.6,7.8) 63(5.6,8.45) 64(5.6,9.1) 65(5.6,9.75) 66(5.6,10.4)
  silkscreen extent -5.72,-11.2 4.43,11.32, body extent -5.05,-11.2 5.05,11.2, height 1.2
TSQFP50P1200X1200X145-64N [mm] "TSQFP, 64-Leads, Body 10.00x10.00mm, Pitch 0.50mm, IPC Medium Density"
  oval 1.75x0.3 smd: 1(-5.575,3.75) 2(-5.575,3.25) 3(-5.575,2.75) 4(-5.575,2.25) 5(-5.575,1.75) 6(-5.575,1.25) 7(-5.575,0.75) 8(-5.575,0.25) 9(-5.575,-0.25) 10(-5.575,-0.75) 11(-5.575,-1.25) 12(-5.575,-1.75) 13(-5.575,-2.25) 14(-5.575,-2.75) 15(-5.575,-3.25) 16(-5.575,-3.75) 33(5.575,-3.75) 34(5.575,-3.25) 35(5.575,-2.75) 36(5.575,-2.25) 37(5.575,-1.75) 38(5.575,-1.25) 39(5.575,-0.75) 40(5.575,-0.25) 41(5.575,0.25) 42(5.575,0.75) 43(5.575,1.25) 44(5.575,1.75) 45(5.575,2.25) 46(5.575,2.75) 47(5.575,3.25) 48(5.575,3.75)
  oval 0.3x1.75 smd: 17(-3.75,-5.575) 18(-3.25,-5.575) 19(-2.75,-5.575) 20(-2.25,-5.575) 21(-1.75,-5.575) 22(-1.25,-5.575) 23(-0.75,-5.575) 24(-0.25,-5.575) 25(0.25,-5.575) 26(0.75,-5.575) 27(1.25,-5.575) 28(1.75,-5.575) 29(2.25,-5.575) 30(2.75,-5.575) 31(3.25,-5.575) 32(3.75,-5.575) 49(3.75,5.575) 50(3.25,5.575) 51(2.75,5.575) 52(2.25,5.575) 53(1.75,5.575) 54(1.25,5.575) 55(0.75,5.575) 56(0.25,5.575) 57(-0.25,5.575) 58(-0.75,5.575) 59(-1.25,5.575) 60(-1.75,5.575) 61(-2.25,5.575) 62(-2.75,5.575) 63(-3.25,5.575) 64(-3.75,5.575)
  silkscreen extent -5.7,-4.3 4.3,4.57, body extent -5,-5 5,5, height 1.45

## Part data
C1 C2 C3 C4 C5 C6 C7 C8 C9 C10 C11 C12 C13 C14 C15 C16 C17 C18 C19 C20 C21 C22 C23 C24 C25 C26 C27 C28 C29 C30 C31 C32 C33 C34 C35 C36 C37 C38 C39 C40 C41 C42 C43 C44 C45 C46 C47 C48 C49 C50 C51 C52 C53 C54 C55 C56 C57 C58 C59 C60 C61 C62 C63 C64 C65 C66 C67 C68 C69 C70 C71 C72 C73 C74 C75 C76 C77 C78 C79 C80 C81 C82 C83 C84 C85 C86 C87 C88 C89 C90 C91 C92 C93 C94 C95 C96 C97 C98 C99 C100 C101 C102 C103 C104 C105 C106 C107 C108 C109 C110 C111 C112 C113 C114 C115 C116: "Capacitor"
D1 D2 D3 D4 D5 D6 D7 D8 D9 D10 D11 D12 D13 D14 D15 D16 D17 D18 D19 D20 D21 D22 D23: library part "D Zener", "Zener Diode"
D24: "Typical RED, GREEN, YELLOW, AMBER GaAs LED"
J1: "Header, 7-Pin, Dual row"
L1 L2 L3 L4 L5 L6 L7 L8 L9 L10 L11: library part Inductor, "Inductor"
Q5: library part DDR256
Q9 Q12: library part AP1117
R1 R2 R3 R4 R5 R6 R7 R8 R9 R10 R11 R12 R13 R14 R15 R16 R17 R18 R19 R20 R21 R22 R23 R24 R25 R26 R27 R28 R29 R30 R31 R32 R33 R34 R35 R36 R37 R38 R39 R40 R41: "Resistor"
Y1: library part XTAL

## Via types
v1: diameter 18, hole 10, Top Layer to Bottom Layer, 287 vias
v2: diameter 19.68, hole 7.87, Top Layer to Bottom Layer, 16 vias

## Nets (pads, with @x,y where several pads share a name; then routed paths per layer and width w, separated by ;. In a path a pad name is that pad's centre, name@x,y a point inside that pad or via, vN(x,y) a via of type N, cw(c..) or ccw(c..) an arc to the next point about the centre after c; other vN are vias at no path point)
1V0: C47.1 C48.1 C59.2 C60.2 C61.2 C62.2 C63.1 C64.1 C65.1 C66.1 L5.2 Q1.E10 Q1.F7 Q1.F9 Q1.F11 Q1.G6 Q1.H9 Q1.J6 Q1.K9 Q1.L8 R31.2 | length 250.6
  Top Layer w5: v1(4429.13,2185.04) Q1.L8@4448.82,2165.35 ; v1(4468.5,2106.3) Q1.K9@4488.19,2125.98 ; v1(4507.87,2263.78) Q1.J6@4527.56,2244.09 ; Q1.H9@4566.93,2125.98 v1(4586.62,2106.3) ; Q1.G6@4606.3,2244.09 v1(4625.99,2263.78) ; Q1.F11@4645.67,2047.24 v1(4665.36,2027.56) ; Q1.F9@4645.67,2125.98 v1(4665.36,2106.3) ; Q1.F7@4645.67,2204.72 v1(4665.36,2224.41) ; Q1.E10@4685.04,2086.61 v1(4704.73,2066.93)
1V8: C2.2 C37.2 C38.2 C39.2 C40.2 C53.1 C54.1 C72.2 C73.2 C74.2 C75.1 C76.1 C77.1 C90.2 C91.2 C92.2 C93.2 C94.1 C95.1 C96.1 L6.2 L7.2 L8.2 L9.2 Q1.A16 Q1.B13 Q1.C10 Q1.E14 Q1.G8 Q1.G10 Q1.H15 Q1.J10 Q1.J12 Q1.K11 Q1.L10 Q2.23 Q2.58 R6.2 R7.2 R8.2 R33.2 | length 1241.8
  Top Layer w5: v1(4429.13,2066.93) Q1.L10@4448.82,2086.61 ; v1(4468.5,2027.56) Q1.K11@4488.19,2047.24 ; v1(4507.87,1988.19) Q1.J12@4527.56,2007.87 ; v1(4507.87,2066.93) Q1.J10@4527.56,2086.61 ; Q1.H15@4566.93,1889.76 v1(4586.62,1870.08) ; Q1.G10@4606.3,2086.61 v1(4625.99,2066.93) ; Q1.G8@4606.3,2165.35 v1(4625.99,2185.04) ; Q1.E14@4685.04,1929.13 v1(4704.73,1909.45) ; Q1.C10@4763.78,2086.61 v1(4783.47,2066.93)
  Top Layer w10: Q2.58@3838.58,1808.07 v1(3838.58,1751.97) 3849.02,1741.54 C37.2@3849.02,1722.44 C38.2@3849.02,1683.07 ; v1(3838.58,2194.88) Q2.23@3838.58,2247.05 ; Q1.B13@4803.15,1968.5 v1(4822.83,1948.82) ; Q1.A16@4842.52,1850.39 v1(4872.05,1850.39) ; L8.2@5177.17,2401.57 v1(5177.17,2440.94) ; L8.2@5216.54,2401.57 v1(5216.54,2440.94) ; L8.2@5255.91,2401.57 v1(5255.91,2440.94) ; R8.2@5820.87,2194.88 v1(5846.46,2194.88) ; R6.2@5820.87,2431.1 v1(5846.46,2431.1)
  Bottom Layer w10: v1(3838.58,2194.88) 3849.02,2184.45 C39.2@3849.02,2145.67 C40.2@3849.02,2106.3 ; v1(4557.09,1791.34) C95.1@4592.52,1791.34 ; v1(4586.62,1870.08) C92.2@4615.55,1870.08 ; C2.2@4605.71,2164.76 v1(4625.99,2185.04) ; C93.2@4704.72,1880.51 v1(4704.73,1909.45) ; v1(4783.47,2066.93) 4784.05,2066.93 C90.2@4812.99,2095.87 ; C91.2@4843.11,1850.39 v1(4872.05,1850.39) ; v1(4901.57,2273.62) 4954.72,2273.62 C94.1@4960.63,2279.53 ; v1(5846.46,2194.88) v1(5846.46,2372.05) v1(5846.46,2431.1)
2V5: C78.2 C79.2 C80.2 C81.2 C82.1 C83.1 C84.2 C85.2 C86.2 C87.2 C88.2 C89.2 C111.1 C113.1 Q1.A6 Q1.B3 Q1.D7 Q1.E4 Q1.F1 Q1.J2 Q5.1 Q5.3 Q5.9 Q5.15 Q5.18 Q5.33 Q5.55 Q5.61 Q12.2 Q12.4 R37.1 | length 921.9
  Top Layer w5: v1(4507.87,2421.26) Q1.J2@4527.56,2401.57 ; Q1.E4@4685.04,2322.83 4704.73,2342.52 ; 4704.72,2342.52 v1(4704.72,2381.89) ; Q1.D7@4724.41,2204.72 4744.1,2224.41 v1(4741.24,2227.26)
  Top Layer w10: v1(4273.62,3082.68) Q5.15@4326.77,3082.68 ; v1(4273.62,3236.22) Q5.9@4326.77,3236.22 ; v1(4275.59,3005.91) Q5.18@4326.77,3005.91 ; v1(4275.59,3389.76) Q5.3@4326.77,3389.76 ; v1(4275.59,3440.94) Q5.1@4326.77,3440.94 ; v1@4277.56,2620.08 v1(4275.59,2622.05) Q5.33@4326.77,2622.05 C83.1@4326.77,2578.74 ; Q1.F1@4645.67,2440.94 v1(4645.67,2470.47) ; Q5.55@4767.72,3159.45 v1(4832.68,3159.45) ; Q5.61@4767.72,3312.99 v1(4828.74,3312.99) ; Q1.B3@4803.15,2362.2 v1(4822.84,2381.89) ; Q1.A6@4842.52,2244.09 v1(4872.05,2244.09) ; v1(4901.57,2864.17) R37.1@4901.57,2899.61 ; C82.1@4931.1,2458.66 4933.07,2460.63 v1(4960.63,2460.63)
  Bottom Layer w10: C79.2@4488.19,2469.88 4491,2467.07 4491,2438.13 v1(4507.87,2421.26) ; C81.2@4645.67,2441.54 v1(4645.67,2470.47) ; v1(4704.72,2381.89) 4704.72,2372.05 4715.16,2361.61 C78.2@4724.41,2361.61 ; C80.2@4822.24,2421.26 4822.84,2420.67 v1(4822.84,2381.89)
3V3: C1.2 C30.1 C33.2 C34.2 C35.2 C36.2 C49.1 C70.1 C71.1 C97.1 C98.2 C99.2 C100.2 C101.2 C102.1 C103.1 C105.2 C106.2 C107.2 C108.2 C109.1 C110.1 D24.A J1.2 L10.2 Q1.E7 Q1.L6 Q1.L16 Q1.M3 Q1.M9 Q1.M13 Q1.N10 Q1.P7 Q1.R4 Q1.R14 Q1.T1 Q1.T11 Q2.4 Q2.11 Q2.29 Q3.4 Q3.10 Q3.11 Q6.8 Q7.1 Q7.3 R1.2 R2.2 R3.2 R4.2 R5.2 R14.2 R15.2 R16.2 R35.2 | length 1439.6
  Top Layer w5: v1(4232.28,2460.63) Q1.T1@4251.97,2440.94 ; v1(4271.65,2342.52) Q1.R4@4291.34,2322.83 ; v1(4311.02,2224.41) Q1.P7@4330.71,2204.72 ; v1(4389.76,1948.82) Q1.M13@4409.45,1968.5 ; v1(4389.76,2381.89) Q1.M3@4409.45,2362.2 ; v1(4429.13,1830.71) Q1.L16@4448.82,1850.39 ; v1(4429.13,2263.78) Q1.L6@4448.82,2244.09 ; Q1.E7@4685.04,2204.72 v1(4704.73,2224.41)
  Top Layer w10: v1(3720.47,2194.88) Q2.29@3720.47,2247.05 ; v1(3956.69,2076.77) Q2.11@4028.54,2076.77 ; v1(3966.54,1938.98) Q2.4@4028.54,1938.98 ; v1(4031.5,2444.88) Q3.10@4088.58,2444.88 ; v1(4035.43,2470.47) Q3.11@4088.58,2470.47 Q3.10@4088.58,2444.88 ; C30.1@4153.54,2450.2 4148.23,2444.88 Q3.10@4088.58,2444.88 ; v1(4232.28,2047.24) Q1.T11@4251.97,2047.24 ; v1(4271.65,1909.45) Q1.R14@4291.34,1929.13 ; Q1.N10@4370.08,2086.61 v1(4389.76,2106.3) Q1.M9@4409.45,2125.98 ; R3.2@4935.04,1712.6 R2.2@4935.04,1643.7 R1.2@4935.04,1574.8 4941.14,1568.7 v1(4964.37,1568.7) 4980.31,1584.65 C1.2@4980.31,1603.74
  Bottom Layer w5: R4.2@4389.76,1915.35 v1(4389.76,1948.82)
  Bottom Layer w10: C36.2@3877.95,1959.25 C35.2@3917.32,1959.25 3946.26,1959.25 v1(3966.54,1938.98) ; C33.2@3887.8,2087.2 C34.2@3927.17,2087.2 3946.26,2087.2 v1(3956.69,2076.77) ; C102.1@4163.39,1903.54 4228.94,1903.54 C98.2@4232.28,1900.2 4241.53,1909.45 v1(4271.65,1909.45) ; C103.1@4183.07,2053.15 4188.98,2047.24 v1(4232.28,2047.24) C100.2@4232.28,2076.18 ; C101.2@4360.24,2115.55 4369.49,2106.3 v1(4389.76,2106.3) ; C99.2@4390.35,1830.71 v1(4429.13,1830.71) ; v1(4964.37,1568.7) Q6.8@5007.87,1568.7
5V: C46.1 C50.1 C52.1 C69.1 C104.1 J2.18 L11.1 Q8.2 Q8.7 Q9.3 Q10.2 Q10.7 Q11.2 Q11.7 Q12.3 R10.1 R11.1
A0: Q1.K3 Q5.29 | length 464.8
  Top Layer w5: Q5.29@4326.77,2724.41 v1(4387.8,2724.41) ; v1(4468.5,2381.89) Q1.K3@4488.19,2362.2
  Bottom Layer w5: v1(4387.8,2724.41) 4448.98,2663.23 4448.98,2460.47 4468.5,2440.94 v1(4468.5,2381.89)
A1: Q1.K5 Q5.30 | length 518.5
  Top Layer w5: Q5.30@4326.77,2698.82 v1(4377.95,2698.82) ; v1(4468.5,2303.15) Q1.K5@4488.19,2283.46
  Bottom Layer w5: v1(4377.95,2698.82) 4383.57,2698.82 4438.98,2643.41 4438.98,2448.89 4455.63,2432.24 4455.63,2410.28 4452,2406.65 4452,2319.65 v1(4468.5,2303.15)
A2: Q1.L3 Q5.31 | length 409.8
  Top Layer w5: Q5.31@4326.77,2673.23 v1(4385.83,2673.23) ; v1(4429.13,2381.89) Q1.L3@4448.82,2362.2
  Bottom Layer w5: v1(4385.83,2673.23) 4399.61,2659.45 4399.61,2474.12 4445.63,2428.1 4445.63,2414.43 4442,2410.8 4442,2394.76 v1(4429.13,2381.89)
A3: Q1.L2 Q5.32 | length 327.8
  Top Layer w5: Q5.32@4326.77,2647.64 v1(4379.92,2647.64) ; v1(4429.13,2421.26) Q1.L2@4448.82,2401.57
  Bottom Layer w5: v1(4379.92,2647.64) 4389.61,2637.95 4389.61,2460.79 v1(4429.13,2421.26)
A3V3: C41.2 C42.2 C51.1 Q2.40 Q9.2 Q9.4 | length 124.9
  Top Layer w10: Q2.40@3589.57,2037.4 v1(3641.73,2037.4)
  Bottom Layer w10: v1(3641.73,2037.4) 3650.98,2028.15 C42.2@3671.26,2028.15 C41.2@3710.63,2028.15
A4: Q1.C6 Q5.35 | length 554.2
  Top Layer w5: Q1.C6@4763.78,2244.09 v1(4783.47,2263.78) ; Q5.35@4767.72,2647.64 v1(4822.83,2647.64)
  Bottom Layer w5: v1(4783.47,2263.78) 4787.77,2263.78 4852.52,2328.54 4852.52,2362.2 4891.57,2401.26 4891.57,2411.26 4891.73,2411.42 4891.73,2480.32 4862.2,2509.84 4862.2,2627.95 4842.52,2647.64 v1(4822.83,2647.64)
A5: Q1.B4 Q5.36 | length 519.2
  Top Layer w5: Q5.36@4767.72,2673.23 4809.06,2673.23 v1(4812.99,2677.17) ; Q1.B4@4803.15,2322.83 4822.84,2342.52 4862.2,2342.52 v1(4891.73,2372.05)
  Bottom Layer w5: v1(4812.99,2677.17) 4842.52,2677.17 4901.73,2617.95 4901.73,2407.12 4901.57,2406.96 4901.57,2381.89 v1(4891.73,2372.05)
A5V: C28.1 C29.1 L11.2 Q3.3
A6: Q1.A4 Q5.37 | length 526.8
  Top Layer w5: Q5.37@4767.72,2698.82 4830.71,2698.82 v1(4832.68,2696.85) ; Q1.A4@4842.52,2322.83 v1(4872.05,2322.83)
  Bottom Layer w5: v1(4832.68,2696.85) 4836.98,2696.85 4911.73,2622.09 4911.73,2352.68 4881.89,2322.83 v1(4872.05,2322.83)
A7: Q1.B5 Q5.38 | length 639.2
  Top Layer w5: Q5.38@4767.72,2724.41 v1(4812.99,2724.41) ; Q1.B5@4803.15,2283.46 4822.84,2303.15 v1@4901.56,2303.15
  Bottom Layer w5: v1(4812.99,2724.41) 4834.65,2724.41 4921.73,2637.32 4921.73,2323.31 v1(4901.56,2303.14)
A8: Q1.E6 Q5.39 | length 715.3
  Top Layer w5: Q1.E6@4685.04,2244.09 v1(4704.73,2263.78) ; v1(4714.57,2746.06) 4718.5,2750 Q5.39@4767.72,2750
  Bottom Layer w5: v1(4704.73,2263.78) 4724.41,2283.46 4793.31,2283.46 4842.52,2332.68 4842.52,2450.94 4714.57,2578.9 v1(4714.57,2746.06)
A9: Q1.D5 Q5.40 | length 647.3
  Top Layer w5: v1(4714.57,2775.59) Q5.40@4767.72,2775.59 ; Q1.D5@4724.41,2283.46 v1(4744.1,2303.15)
  Bottom Layer w5: v1(4714.57,2775.59) 4688.38,2749.41 4688.38,2555.71 4799.97,2444.13 4799.97,2335.69 4790.3,2326.02 4766.97,2326.02 v1(4744.1,2303.15)
A10: Q1.J5 Q5.28 | length 584.1
  Top Layer w5: Q5.28@4326.77,2750 v1(4375.98,2750) ; v1(4507.87,2303.15) Q1.J5@4527.56,2283.46
  Bottom Layer w5: v1(4375.98,2750) 4385.54,2750 4458.98,2676.56 4458.98,2464.61 4478.5,2445.09 4478.5,2395.23 4485,2388.73 4485,2326.02 v1(4507.87,2303.15)
A11: Q1.C3 Q5.41 | length 575.9
  Top Layer w5: v1(4694.88,2805.12) 4698.82,2801.18 Q5.41@4767.72,2801.18 ; Q1.C3@4763.78,2362.2 v1(4783.47,2381.89)
  Bottom Layer w5: v1(4694.88,2805.12) 4678.38,2788.62 4678.38,2546.03 4773.62,2450.79 4783.47,2440.94 v1(4783.47,2381.89)
A12: Q1.C4 Q5.42 | length 655.6
  Top Layer w5: v1(4714.57,2824.8) 4716.54,2826.77 Q5.42@4767.72,2826.77 ; Q1.C4@4763.78,2322.83 v1(4783.47,2342.52)
  Bottom Layer w5: v1(4714.57,2824.8) 4675.83,2824.8 4665.98,2814.96 4665.98,2523.35 4763.78,2425.56 4763.78,2362.21 v1(4783.47,2342.52)
ADVB: C8.2 Q2.47 | length 122.7
  Top Layer w5: C8.2@3494.68,1860.24 3523.62,1860.24 3533.46,1870.08 3533.46,1889.76 3543.31,1899.61 Q2.47@3589.57,1899.61
ADVFB: D21.K Q2.34 R23.1 R28.2 | length 336.2
  Top Layer w5: R28.2@3517.72,2391.73 3519.69,2389.76 R23.1@3519.69,2312.99 3533.46,2312.99 D21.K@3592.52,2253.94 3592.52,2234.25 3543.31,2185.04 3543.31,2165.35 3553.15,2155.51 Q2.34@3589.57,2155.51
ADVG: C7.2 Q2.49 | length 108.8
  Top Layer w5: C7.2@3593.11,1761.81 3593.27,1761.97 3651.73,1761.97 3661.42,1771.65 Q2.49@3661.42,1808.07
ADVHS: D22.K Q2.56 R24.1 R27.2 | length 384.6
  Top Layer w5: Q2.56@3799.21,1808.07 3799.21,1771.65 3779.53,1751.97 3779.53,1669.29 3834.65,1614.17 3901.57,1614.17 3921.26,1594.49 D22.K@3986.22,1594.49
ADVR: C5.2 Q2.48 | length 191.7
  Top Layer w5: C5.2@3494.68,1761.81 3514.37,1781.5 3572.83,1781.5 3589.57,1798.23 Q2.48@3589.57,1879.92
ADVSOG: C9.2 Q2.50 | length 279
  Top Layer w5: C9.2@3523.62,1649.61 3557.09,1683.07 3622.05,1683.07 3631.89,1692.91 3631.89,1742.13 3641.73,1751.97 3671.26,1751.97 3681.1,1761.81 Q2.50@3681.1,1808.07
ADVVS: D23.K Q2.55 R25.1 R26.2
ADVY: C3.2 Q2.36 | length 107.1
  Top Layer w5: C3.2@3494.68,2145.67 3523.62,2145.67 3553.15,2116.14 Q2.36@3589.57,2116.14
AIN1: C4.1 R17.1 | length 50.6
  Top Layer w5: R17.1@3450.79,2234.25 3454.13,2230.91 C4.1@3454.13,2185.04
AIN3: C6.1 R18.1 | length 74
  Top Layer w10: R18.1@3385.83,1895.67 3440.35,1895.67 C6.1@3454.13,1909.45
ANINT: Q1.P13 Q2.1 R16.1 | length 532.3
  Top Layer w5: v1(3976.38,1879.92) Q2.1@4028.54,1879.92 ; v1(4311.02,1948.82) Q1.P13@4330.71,1968.5
  Bottom Layer w5: R16.1@3937.01,1807.09 3976.38,1846.46 v1(3976.38,1879.92) 4045.27,1948.82 v1(4311.02,1948.82)
AUDBCK: Q1.R3 Q3.8 | length 215.8
  Top Layer w5: Q3.8@4088.58,2393.7 4220.47,2393.7 4232.28,2381.89 4271.65,2381.89 Q1.R3@4291.34,2362.2
AUDDOUT: Q1.T2 Q3.9 | length 170.7
  Top Layer w5: Q3.9@4088.58,2419.29 4234.25,2419.29 Q1.T2@4251.97,2401.57
AUDL: C21.1 D12.2 J3.6 J4.2
AUDLRCK: Q1.T4 Q3.7 | length 423.3
  Top Layer w5: Q3.7@3864.17,2393.7 3868.11,2389.76 3868.11,2379.31 3885.06,2362.36 4098.63,2362.36 4138.16,2322.83 Q1.T4@4251.97,2322.83
AUDR: C20.1 D13.2 J3.2 J4.3
AUDSCK: Q1.T3 Q3.6 | length 411.4
  Top Layer w5: Q3.6@3864.17,2419.29 3889.76,2419.29 3936.69,2372.36 4102.77,2372.36 4112.93,2362.2 Q1.T3@4251.97,2362.2
BA0: Q1.J4 Q5.26 | length 622.7
  Top Layer w5: Q5.26@4326.77,2801.18 v1(4374.02,2801.18) ; v1(4507.87,2342.52) Q1.J4@4527.56,2322.83
  Bottom Layer w5: v1(4374.02,2801.18) 4393.7,2801.18 4517.87,2677.01 4517.87,2450.79 4534.37,2434.29 4534.37,2385.06 4507.87,2358.56 v1(4507.87,2342.52)
BA1: Q1.J3 Q5.27 | length 547.1
  Top Layer w5: Q5.27@4326.77,2775.59 v1(4389.76,2775.59) ; v1(4507.87,2381.89) Q1.J3@4527.56,2362.2
  Bottom Layer w5: v1(4389.76,2775.59) 4507.87,2657.48 4507.87,2444.6 4524.37,2428.1 4524.37,2414.43 4507.87,2397.93 v1(4507.87,2381.89)
CAPC2: C16.1 C17.1 C18.1 Q2.44 | length 160
  Top Layer w10: v1(3543.31,1958.66) Q2.44@3589.57,1958.66
  Bottom Layer w10: C18.1@3503.94,1954.72 3539.37,1954.72 v1(3543.31,1958.66) 3602.95,1958.66 C17.1@3612.2,1967.91
CAPY1: C10.2 C11.2 C12.2 Q2.38 | length 165.4
  Top Layer w10: v1(3543.31,2076.77) Q2.38@3589.57,2076.77
  Bottom Layer w10: C12.2@3539.37,2135.83 3543.31,2131.89 v1(3543.31,2076.77) C11.2@3572.24,2076.77 C10.2@3572.24,2047.24
CAPY2: C10.1 C11.1 C12.1 C13.1 C16.2 C17.2 C18.2 C19.2 Q2.39 | length 405.7
  Top Layer w10: Q2.39@3589.57,2057.09 3631.89,2057.09 v1(3641.72,2066.93)
  Bottom Layer w10: C18.2@3503.94,2021.65 3517.13,2008.46 C16.2@3582.68,2008.46 C17.2@3612.2,2008.46 3612.2,2046.65 C10.1@3612.8,2047.24 ; C12.1@3606.3,2135.83 3612.8,2129.33 C11.1@3612.8,2076.77 C10.1@3612.8,2047.24 ; v1(3641.72,2066.93) 3622.05,2047.24 C10.1@3612.8,2047.24 ; v1(3641.72,2066.93) C19.2@3670.67,2066.93 C13.1@3670.67,2106.3
CAS: Q1.H4 Q5.22 | length 733.4
  Top Layer w5: Q5.22@4326.77,2903.54 v1(4370.08,2903.54) ; Q1.H4@4566.93,2322.83 v1(4586.62,2342.52)
  Bottom Layer w5: v1(4370.08,2903.54) 4389.76,2903.54 4564.37,2728.93 4564.37,2364.76 v1(4586.62,2342.52)
CCLK: Q6.6 R39.1 | length 871.6
  Bottom Layer w5: R39.1@4576.77,2007.28 4576.77,1948.82 4537.56,1909.61 4537.56,1771.5 4556.46,1752.6 4746.84,1752.6 4747.15,1752.28 4753.58,1752.28 4759.31,1758.01 5034.11,1758.01 5049.21,1742.91 5049.21,1710.04 Q6.6@5007.87,1668.7
CCLK1: Q1.E8 R39.2 | length 241.1
  Top Layer w5: Q1.E8@4685.04,2165.35 v1(4704.72,2185.04)
  Bottom Layer w5: R39.2@4576.77,2047.83 4586.61,2047.83 4606.3,2067.52 4606.3,2116.14 4638.17,2148.01 4667.7,2148.01 v1(4704.72,2185.04)
CK_N: Q1.F5 Q5.46 | length 799.8
  Top Layer w5: Q1.F5@4645.67,2283.46 v1(4665.36,2303.15) ; v1(4694.88,2933.07) 4698.82,2929.13 Q5.46@4767.72,2929.13
  Bottom Layer w5: v1(4665.36,2303.15) 4678.22,2316.02 4678.22,2332.06 4681.86,2335.69 4681.86,2349.36 4678.22,2352.99 4678.22,2463.15 4635.98,2505.39 4635.98,2903.7 4665.35,2933.07 v1(4694.88,2933.07)
CK_P: Q1.E5 Q5.45 | length 797.2
  Top Layer w5: Q1.E5@4685.04,2283.46 v1(4704.73,2303.15) ; v1(4714.57,2903.54) Q5.45@4767.72,2903.54
  Bottom Layer w5: v1(4704.73,2303.15) 4714.57,2312.99 4714.57,2342.52 4714.19,2342.89 4712.61,2342.89 4688.22,2367.28 4688.22,2467.29 4645.98,2509.53 4645.98,2899.56 4669.5,2923.07 4681.55,2923.07 4701.07,2903.54 v1(4714.57,2903.54)
CKE: Q1.D4 Q5.44 | length 683
  Top Layer w5: v1@4700.79,2877.95 Q5.44@4767.72,2877.95 ; Q1.D4@4724.41,2322.83 v1(4744.1,2342.52)
  Bottom Layer w5: v1(4704.72,2874.02) 4655.98,2825.28 4655.98,2519.21 4744.09,2431.1 v1(4744.1,2342.52)
CML: C14.2 C15.2 Q2.42 | length 136.4
  Top Layer w10: C15.2@3494.68,1948.82 3507.87,1962.01 C14.2@3507.87,1998.03 Q2.42@3589.57,1998.03
CS: Q1.H5 Q5.24 | length 692.6
  Top Layer w5: Q5.24@4326.77,2852.36 v1(4368.11,2852.36) ; v1(4547.24,2303.15) Q1.H5@4566.93,2283.46
  Bottom Layer w5: v1(4368.11,2852.36) 4527.87,2692.6 4527.87,2454.93 4544.37,2438.43 4544.37,2306.02 v1(4547.24,2303.15)